# EAGLE board Board2 (EAGLE 7.4.0)
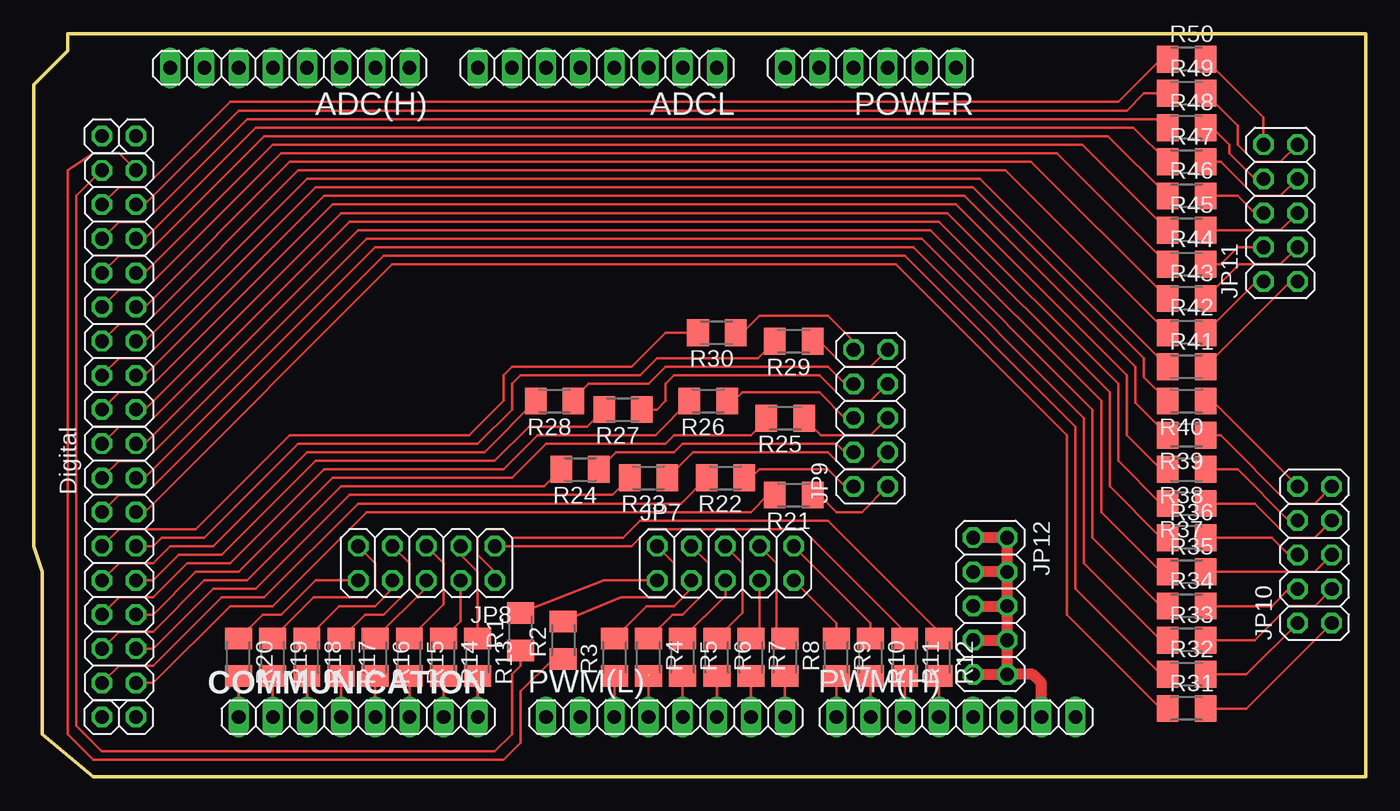
[diagram p0: board, top side]

Size 99.06 x 55.25 mm. Coordinates in mm from the lower left corner, seen from the top.
Outline: 99.06,0 4.45,0 0.64,3.17 0.64,15.24 0,17.14 0,51.44 2.54,53.98 2.54,55.25 99.06,55.25 99.06,0
Copper layers 1: Top 0.035mm
Design rules "Fab *": minimum track width 8mil, minimum drill 24mil, track to track 15.625mil, track to pad 15.625mil, pad to pad 15.625mil, via to via 15.625mil, smd to smd 15.625mil, copper to edge 0mil, drill to drill 8mil, minimum pad ring 10mil, minimum via ring 8mil, stop-mask expansion 4mil, vias tented up to drill 0mil, thermal gap 10mil
Net classes: 0 default: width 0.203 mm, drill 0.406 mm, clearance 0.203 mm; 1 power: width 0.203 mm, drill 0.711 mm, clearance 0.203 mm; 2 gnd: width 0.203 mm, drill 0.711 mm, clearance 0.203 mm; 3 usbvcc: width 0.203 mm, drill 0.711 mm, clearance 0.203 mm

## Footprints (pad centres in the part's own frame; a part is rotated, then mirrored left to right if it is on the bottom)
1X08 = drill 1.016 long: 1 -8.89,0; 2 -6.35,0; 3 -3.81,0; 4 -1.27,0; 5 1.27,0; 6 3.81,0; 7 6.35,0; 8 8.89,0
2X08 = drill 1.016 octagon: 1 -8.89,-1.27; 2 -8.89,1.27; 3 -6.35,-1.27; 4 -6.35,1.27; 5 -3.81,-1.27; 6 -3.81,1.27; 7 -1.27,-1.27; 8 -1.27,1.27; 9 1.27,-1.27; 10 1.27,1.27; 11 3.81,-1.27; 12 3.81,1.27; 13 6.35,-1.27; 14 6.35,1.27; 15 8.89,-1.27; 16 8.89,1.27
1X01 = drill 1.016 octagon: 1 0,0
2X05 = drill 1.016 octagon: 1 -5.08,-1.27; 2 -5.08,1.27; 3 -2.54,-1.27; 4 -2.54,1.27; 5 0,-1.27; 6 0,1.27; 7 2.54,-1.27; 8 2.54,1.27; 9 5.08,-1.27; 10 5.08,1.27
1X06 = drill 1.016 long: 1 -6.35,0; 2 -3.81,0; 3 -1.27,0; 4 1.27,0; 5 3.81,0; 6 6.35,0
M1206 = smd 1.6 x 2: 1 -1.4,0; 2 1.4,0

## Placement (x,y rotation side)
ADC(H)  [1X08]  19.05,52.7 180 top
ADCL  [1X08]  41.91,52.7 180 top
COMMUNICATION  [1X08]  24.13,4.45 0 top
JP1  Digital  [2X08]  6.35,15.88 270 top
JP2  Digital  [2X08]  6.35,36.2 270 top
JP3  [1X01]  7.62,4.45 180 top
JP4  [1X01]  5.08,4.45 180 top
JP5  [1X01]  7.62,47.62 180 top
JP6  [1X01]  5.08,47.62 180 top
JP7  [2X05]  51.44,15.88 0 top
JP8  [2X05]  29.21,15.88 180 top
JP9  [2X05]  62.23,26.67 90 top
JP10  [2X05]  95.25,16.51 90 top
JP11  [2X05]  92.71,41.91 90 top
JP12  [2X05]  71.12,12.7 270 top
POWER  [1X06]  62.23,52.7 180 top
PWM(H)  [1X08]  68.58,4.45 0 top
PWM(L)  [1X08]  46.99,4.45 0 top
R1  [M1206]  36.2,10.79 90 top
R2  [M1206]  39.37,10.16 90 top
R3  [M1206]  43.18,8.89 90 top
R4  [M1206]  45.72,8.89 270 top
R5  [M1206]  48.26,8.89 270 top
R6  [M1206]  50.8,8.89 270 top
R7  [M1206]  53.34,8.89 270 top
R8  [M1206]  55.88,8.89 270 top
R9  [M1206]  59.69,8.89 270 top
R10  [M1206]  62.23,8.89 270 top
R11  [M1206]  64.77,8.89 270 top
R12  [M1206]  67.31,8.89 270 top
R13  [M1206]  33.02,8.89 270 top
R14  [M1206]  30.48,8.89 270 top
R15  [M1206]  27.94,8.89 270 top
R16  [M1206]  25.4,8.89 270 top
R17  [M1206]  22.86,8.89 270 top
R18  [M1206]  20.32,8.89 270 top
R19  [M1206]  17.78,8.89 270 top
R20  [M1206]  15.24,8.89 270 top
R21  [M1206]  56.52,20.96 180 top
R22  [M1206]  51.44,22.23 180 top
R23  [M1206]  45.72,22.23 180 top
R24  [M1206]  40.64,22.86 180 top
R25  [M1206]  55.88,26.67 180 top
R26  [M1206]  50.16,27.94 180 top
R27  [M1206]  43.81,27.3 180 top
R28  [M1206]  38.73,27.94 180 top
R29  [M1206]  56.52,32.38 180 top
R30  [M1206]  50.8,33.02 180 top
R31  [M1206]  85.72,5.08 0 top
R32  [M1206]  85.72,7.62 0 top
R33  [M1206]  85.72,10.16 0 top
R34  [M1206]  85.72,12.7 0 top
R35  [M1206]  85.72,15.24 0 top
R36  [M1206]  85.72,17.78 0 top
R37  [M1206]  85.72,20.32 180 top
R38  [M1206]  85.72,22.86 180 top
R39  [M1206]  85.72,25.4 180 top
R40  [M1206]  85.72,27.94 180 top
R41  [M1206]  85.72,30.48 0 top
R42  [M1206]  85.72,33.02 0 top
R43  [M1206]  85.72,35.56 0 top
R44  [M1206]  85.72,38.1 0 top
R45  [M1206]  85.72,40.64 0 top
R46  [M1206]  85.72,43.18 0 top
R47  [M1206]  85.72,45.72 0 top
R48  [M1206]  85.72,48.26 0 top
R49  [M1206]  85.72,50.8 0 top
R50  [M1206]  85.72,53.34 0 top

## Library data of the parts
ADC(H) ADCL COMMUNICATION JP1-JP12 POWER PWM(H) PWM(L) = pinhead
R1-R50 = resistor

## Nets
+3V3 [power]: POWER.2
+5V [usbvcc]: POWER.3
ADC0: ADCL.1
ADC1: ADCL.2
ADC2: ADCL.3
ADC3: ADCL.4
ADC4: ADCL.5
ADC5: ADCL.6
ADC6: ADCL.7
ADC7: ADCL.8
ADC8: ADC(H).1
ADC9: ADC(H).2
ADC10: ADC(H).3
ADC11: ADC(H).4
ADC12: ADC(H).5
ADC13: ADC(H).6
ADC14: ADC(H).7
ADC15: ADC(H).8
AREF: PWM(H).8
DIG22: JP9.1 R21.1
DIG23: JP9.2 R22.1
DIG24: JP9.3 R23.1
DIG25: JP9.4 R24.1
DIG26 [gnd]: JP9.5 R25.1
DIG27: JP9.6 R26.1
DIG28: JP9.7 R27.1
DIG29: JP9.8 R28.1
DIG30: JP9.9 R29.1
DIG31: JP9.10 R30.1
DIG32: JP1.6 R31.1
DIG33: JP1.5 R32.1
DIG34: JP1.4 R33.1
DIG35: JP1.3 R34.1
DIG36: JP1.2 R35.1
DIG37: JP1.1 R36.1
DIG38: JP2.16 R37.2
DIG39: JP2.15 R38.2
DIG40: JP2.14 R39.2
DIG41: JP2.13 R40.2
DIG42: JP2.12 R41.1
DIG43: JP2.11 R42.1
DIG44: JP2.10 R43.1
DIG45: JP2.9 R44.1
DIG46: JP2.8 R45.1
DIG47: JP2.7 R46.1
DIG48: JP2.6 R47.1
DIG49: JP2.5 R48.1
DIG50: JP2.4 R49.1
DIG51: JP2.3 R50.1
DIG52: JP2.2 R2.1
DIG53: JP2.1 R1.1
GND [gnd]: JP12.1 JP12.2 JP12.3 JP12.4 JP12.5 JP12.6 JP12.7 JP12.8 JP12.9 JP12.10 PWM(H).7
N$1: JP7.3 R3.2
N$2: JP7.5 R5.1
N$3: JP7.7 R7.1
N$4: JP7.9 R9.1
N$5: JP7.2 R2.2
N$6: JP7.4 R4.1
N$7: JP7.6 R6.1
N$8: JP7.8 R8.1
N$9: PWM(H).2 R10.2
N$10: JP8.1 R11.1
N$11: JP8.2 R12.1
N$12: COMMUNICATION.2 R19.2
N$13: COMMUNICATION.3 R18.2
N$14: COMMUNICATION.4 R17.2
N$15: JP8.6 R16.1
N$16: COMMUNICATION.6 R15.2
N$17: JP8.4 R14.1
N$18: COMMUNICATION.8 R13.2
N$19: JP7.1 R1.2
N$20: JP8.10 R20.1
N$21: JP1.7 R30.2
N$22: JP1.9 R28.2
N$23: JP1.11 R26.2
N$24: JP1.13 R24.2
N$25: JP1.15 R22.2
N$26: JP1.16 R21.2
N$27: JP1.14 R23.2
N$28 [gnd]: JP1.12 R25.2
N$29: JP1.10 R27.2
N$30: JP1.8 R29.2
N$31: JP10.5 R35.2
N$32: JP10.3 R33.2
N$33: JP10.1 R31.2
N$34: JP10.2 R32.2
N$35: JP10.4 R34.2
N$36: JP10.6 R36.2
N$37: JP10.7 R37.1
N$38: JP10.9 R39.1
N$39: JP10.8 R38.1
N$40: JP10.10 R40.1
N$41: JP11.9 R49.2
N$42: JP11.7 R47.2
N$43: JP11.5 R45.2
N$44: JP11.3 R43.2
N$45: JP11.1 R41.2
N$46: JP11.2 R42.2
N$47: JP11.4 R44.2
N$48: JP11.6 R46.2
N$49: JP11.8 R48.2
N$50: JP11.10 R50.2
PWM02: PWM(L).3 R3.1
PWM03: PWM(L).4 R4.2
PWM04: PWM(L).5 R5.2
PWM05: PWM(L).6 R6.2
PWM06: PWM(L).7 R7.2
PWM07: PWM(L).8 R8.2
PWM08: PWM(H).1 R9.2
PWM09: JP7.10 R10.1
PWM10: PWM(H).3 R11.2
PWM11: PWM(H).4 R12.2
PWM12: PWM(H).5
PWM13: PWM(H).6
RESET: POWER.1
RX1_D19: JP8.8 R18.1
RX2_D17: COMMUNICATION.5 R16.2
RX3_D15: COMMUNICATION.7 R14.2
RX4_D14: JP8.3 R13.1
SCL_D21: COMMUNICATION.1 R20.2
SDA_D20: JP8.9 R19.1
TX1_D18: JP8.7 R17.1
TX2_D16: JP8.5 R15.1
VIN [power]: POWER.6

## Tracks (layer width: path | path; a pad name or v marks a point on that pad's centre or on a via)
DIG22
  Top 0.203: R21.1 58.42,20.96 59.69,19.69 61.59,19.69 JP9.1
DIG23
  Top 0.203: R22.1 53.34,22.23 53.98,22.86 59.05,22.86 60.33,21.59 JP9.2
DIG24
  Top 0.203: JP9.3 62.23,22.86 60.33,22.86 59.05,24.13 49.02,24.13 R23.1
DIG25
  Top 0.203: JP9.4 60.33,24.13 59.69,24.77 48.26,24.77 47.62,24.13 43.31,24.13 R24.1
DIG26
  Top 0.203: JP9.5 62.23,25.4 58.55,25.4 R25.1
DIG27
  Top 0.203: R26.1 52.07,27.94 52.7,28.58 58.42,28.58 60.33,26.67 JP9.6
DIG28
  Top 0.203: R27.1 46.35,27.3 46.99,27.94 46.99,29.21 47.62,29.85 58.42,29.85 60.33,27.94 62.23,27.94 JP9.7
DIG29
  Top 0.203: JP9.8 60.33,29.21 59.05,30.48 46.99,30.48 45.72,29.21 41.27,29.21 40.13,28.07 R28.1
DIG30
  Top 0.203: R29.1 58.42,32.38 60.33,30.48 62.23,30.48 JP9.9
DIG31
  Top 0.203: R30.1 52.7,33.02 53.98,34.29 59.05,34.29 60.96,32.38 JP9.10
DIG32
  Top 0.203: JP1.6 8.26,19.69 26.67,38.1 64.14,38.1 76.83,25.4 76.83,12.06 83.82,5.08 R31.1
DIG33
  Top 0.203: JP1.5 6.35,20.96 8.26,20.96 26.04,38.73 64.77,38.73 77.47,26.04 77.47,13.97 83.82,7.62 R32.1
DIG34
  Top 0.203: JP1.4 8.26,22.23 25.4,39.37 65.41,39.37 78.11,26.67 78.11,15.88 83.82,10.16 R33.1
DIG35
  Top 0.203: JP1.3 6.35,23.5 8.26,23.5 24.77,40.01 66.04,40.01 78.74,27.3 78.74,17.78 83.82,12.7 R34.1
DIG36
  Top 0.203: JP1.2 8.26,24.77 24.13,40.64 66.67,40.64 79.38,27.94 79.38,19.69 83.82,15.24 R35.1
DIG37
  Top 0.203: JP1.1 6.35,26.04 8.26,26.04 23.5,41.27 67.31,41.27 80.01,28.58 80.01,21.59 83.82,17.78 R36.1
DIG38
  Top 0.203: JP2.16 8.26,27.3 22.86,41.91 67.94,41.91 80.64,29.21 80.64,23.5 83.82,20.32 R37.2
DIG39
  Top 0.203: JP2.15 6.35,28.58 8.26,28.58 22.23,42.55 68.58,42.55 81.28,29.85 81.28,25.4 83.82,22.86 R38.2
DIG40
  Top 0.203: JP2.14 8.26,29.85 21.59,43.18 69.22,43.18 81.92,30.48 81.92,27.81 R39.2
DIG41
  Top 0.203: JP2.13 6.35,31.12 8.26,31.12 20.95,43.81 69.85,43.81 82.55,31.12 82.55,29.71 R40.2
DIG42
  Top 0.203: JP2.12 8.26,32.38 20.32,44.45 70.36,44.45 R41.1
DIG43
  Top 0.203: JP2.11 6.35,33.66 8.26,33.66 19.68,45.09 72.26,45.09 R42.1
DIG44
  Top 0.203: JP2.10 8.26,34.93 19.05,45.72 74.17,45.72 R43.1
DIG45
  Top 0.203: JP2.9 6.35,36.2 8.26,36.2 18.41,46.36 76.07,46.36 R44.1
DIG46
  Top 0.203: JP2.8 8.26,37.47 17.78,46.99 77.97,46.99 R45.1
DIG47
  Top 0.203: JP2.7 6.35,38.73 8.26,38.73 17.14,47.62 79.88,47.62 R46.1
DIG48
  Top 0.203: JP2.6 8.26,40.01 16.51,48.26 81.78,48.26 R47.1
DIG49
  Top 0.203: JP2.5 6.35,41.27 8.26,41.27 15.88,48.9 83.69,48.9 R48.1
DIG50
  Top 0.203: JP2.4 8.26,42.55 15.24,49.53 81.28,49.53 82.55,50.8 R49.1
DIG51
  Top 0.203: JP2.3 6.35,43.81 8.26,43.81 14.61,50.16 80.64,50.16 83.82,53.34 R50.1
DIG52
  Top 0.203: R2.1 38.6,8.76 36.2,6.35 36.2,2.54 34.92,1.27 4.45,1.27 2.54,3.17 2.54,45.09 4.45,46.36 6.35,46.36 JP2.2
DIG53
  Top 0.203: R1.1 36.2,8.25 35.56,7.62 35.56,3.17 34.29,1.91 5.08,1.91 3.17,3.81 3.17,43.18 JP2.1
GND
  Top 0.813: PWM(H).7 74.93,6.99 74.3,7.62 JP12.10 | JP12.10 JP12.8 | JP12.8 JP12.6 | JP12.6 JP12.4 | JP12.4 JP12.2 JP12.1 | JP12.4 JP12.3 | JP12.5 JP12.6 | JP12.7 JP12.8 | JP12.9 JP12.10
N$1
  Top 0.203: JP7.3 48.9,13.97 47.62,12.7 45.59,12.7 R3.2
N$2
  Top 0.203: JP7.5 51.44,13.46 R5.1
N$3
  Top 0.203: JP7.7 53.98,10.92 R7.1
N$4
  Top 0.203: JP7.9 59.69,11.43 R9.1
N$5
  Top 0.203: JP7.2 47.62,15.88 47.62,13.97 46.99,13.33 43.69,13.33 R2.2
N$6
  Top 0.203: JP7.4 50.16,15.88 50.16,13.97 48.26,12.06 47.49,12.06 R4.1
N$7
  Top 0.203: JP7.6 52.7,15.88 52.7,12.19 R6.1
N$8
  Top 0.203: R8.1 55.24,10.92 55.24,15.88 JP7.8
N$9
  Top 0.203: PWM(H).2 R10.2
N$10
  Top 0.203: R11.1 64.77,10.79 57.15,18.42 45.72,18.42 44.45,17.14 JP8.1
N$11
  Top 0.203: R12.1 67.31,10.79 59.05,19.05 45.09,19.05 43.81,17.78 35.56,17.78 34.92,18.42 33.66,18.42 33.02,17.78 33.02,16.51 34.29,15.24 JP8.2
N$12
  Top 0.203: COMMUNICATION.2 R19.2
N$13
  Top 0.203: COMMUNICATION.3 R18.2
N$14
  Top 0.203: COMMUNICATION.4 R17.2
N$15
  Top 0.203: 25.4,10.79 R16.1 29.21,14.1 JP8.6
N$16
  Top 0.203: COMMUNICATION.6 R15.2
N$17
  Top 0.203: JP8.4 31.75,11.56 R14.1
N$18
  Top 0.203: COMMUNICATION.8 R13.2
N$19
  Top 0.203: JP7.1 42.41,14.6 R1.2
N$20
  Top 0.203: JP8.10 20.95,14.6 18.41,12.06 17.02,12.06 R20.1
N$21
  Top 0.203: JP1.7 6.35,18.42 12.06,18.42 19.05,25.4 32.38,25.4 34.92,27.94 34.92,29.85 35.56,30.48 44.45,30.48 46.99,33.02 R30.2
N$22
  Top 0.203: JP1.9 6.35,15.88 8.89,15.88 10.16,17.14 13.34,17.14 20.32,24.13 33.52,24.13 R28.2
N$23
  Top 0.203: JP1.11 6.35,13.33 8.89,13.33 11.43,15.88 14.61,15.88 21.59,22.86 34.92,22.86 37.47,25.4 46.23,25.4 R26.2
N$24
  Top 0.203: JP1.13 6.35,10.79 8.89,10.79 12.7,14.6 15.88,14.6 22.86,21.59 37.97,21.59 R24.2
N$25
  Top 0.203: JP1.15 6.35,8.25 8.89,8.25 13.97,13.33 17.14,13.33 24.13,20.32 48.13,20.32 R22.2
N$26
  Top 0.203: R21.2 54.61,20.96 53.34,19.69 24.77,19.69 17.78,12.7 14.61,12.7 8.89,6.99 JP1.16
N$27
  Top 0.203: JP1.14 8.89,9.53 13.34,13.97 16.51,13.97 23.5,20.96 43.05,20.96 R23.2
N$28
  Top 0.203: R25.2 54.48,26.54 53.34,25.4 47.62,25.4 46.99,24.77 38.1,24.77 35.56,22.23 22.23,22.23 15.24,15.24 12.06,15.24 8.89,12.06 JP1.12
N$29
  Top 0.203: JP1.10 8.89,14.6 10.79,16.51 13.97,16.51 20.95,23.5 34.29,23.5 36.83,26.04 41.15,26.04 R27.2
N$30
  Top 0.203: JP1.8 8.89,17.14 9.53,17.78 12.7,17.78 19.68,24.77 33.02,24.77 35.56,27.3 35.56,29.21 36.2,29.85 45.09,29.85 46.35,31.12 53.84,31.12 R29.2
N$31
  Top 0.203: R35.2 95.25,15.24 JP10.5
N$32
  Top 0.203: R33.2 90.81,10.16 93.34,12.7 95.25,12.7 JP10.3
N$33
  Top 0.203: R31.2 90.17,5.08 JP10.1
N$34
  Top 0.203: R32.2 90.17,7.62 JP10.2
N$35
  Top 0.203: R34.2 92.08,12.7 93.34,13.97 JP10.4
N$36
  Top 0.203: R36.2 92.08,17.78 93.34,16.51 JP10.6
N$37
  Top 0.203: R37.1 90.81,20.32 93.34,17.78 95.25,17.78 JP10.7
N$38
  Top 0.203: R39.1 88.27,25.4 93.34,20.32 95.25,20.32 JP10.9
N$39
  Top 0.203: R38.1 89.53,22.86 93.34,19.05 JP10.8
N$40
  Top 0.203: R40.1 87.63,27.94 JP10.10
N$41
  Top 0.203: JP11.9 92.71,45.72 90.81,45.72 89.53,46.99 89.53,48.39 R49.2
N$42
  Top 0.203: R47.2 88.27,45.72 90.81,43.18 92.71,43.18 JP11.7
N$43
  Top 0.203: JP11.5 92.71,40.64 R45.2
N$44
  Top 0.203: JP11.3 92.71,38.1 89.67,38.1 R43.2
N$45
  Top 0.203: JP11.1 93.47,36.83 R41.2
N$46
  Top 0.203: JP11.2 90.94,36.83 R42.2
N$47
  Top 0.203: R44.2 88.27,38.1 89.53,39.37 JP11.4
N$48
  Top 0.203: R46.2 89.53,43.18 90.81,41.91 JP11.6
N$49
  Top 0.203: R48.2 87.63,48.26 88.9,46.99 88.9,46.36 90.81,44.45 JP11.8
N$50
  Top 0.203: JP11.10 91.44,49.02 R50.2
PWM02
  Top 0.203: R3.1 PWM(L).3
PWM03  (1 unrouted)
  Top 0.203: 45.72,7.62 PWM(L).4
PWM04
  Top 0.203: PWM(L).5 R5.2
PWM05
  Top 0.203: PWM(L).6 R6.2
PWM06
  Top 0.203: R7.2 PWM(L).7
PWM07
  Top 0.203: PWM(L).8 R8.2
PWM08
  Top 0.203: R9.2 PWM(H).1
PWM09
  Top 0.203: R10.1 62.23,11.43 JP7.10
PWM10
  Top 0.203: R11.2 PWM(H).3
PWM11
  Top 0.203: PWM(H).4 R12.2
RX1_D19
  Top 0.203: JP8.8 26.67,13.97 25.4,12.7 22.73,12.7 R18.1
RX2_D17
  Top 0.203: COMMUNICATION.5 R16.2
RX3_D15
  Top 0.203: COMMUNICATION.7 R14.2
RX4_D14
  Top 0.203: JP8.3 31.75,16.51 33.02,15.24 R13.1
SCL_D21
  Top 0.203: COMMUNICATION.1 R20.2
SDA_D20
  Top 0.203: JP8.9 25.4,15.88 25.4,13.97 24.77,13.33 20.82,13.33 R19.1
TX1_D18
  Top 0.203: JP8.7 27.94,15.88 27.94,13.97 26.04,12.06 24.64,12.06 R17.1
TX2_D16
  Top 0.203: JP8.5 30.48,15.88 30.48,12.83 R15.1